# EAGLE board contador_programado (EAGLE 9.7.0)

Size 218.29 x 59.69 mm. Coordinates in mm from the lower left corner, seen from the top.
Outline: 0,0 218.29,0 218.29,59.69 0,59.69 0,0
Copper layers (1*16): Top 0.035mm / dielectric 1.5mm / Bottom 0.035mm
Design rules "default": minimum track width 6mil, minimum drill 0.35mm, track to track 6mil, track to pad 6mil, pad to pad 6mil, via to via 6mil, smd to smd 6mil, copper to edge 40mil, drill to drill 6mil, minimum pad ring 10mil, minimum via ring 8mil, stop-mask expansion 4mil, vias tented up to drill 0mil, thermal gap 10mil

## Footprints (pad centres in the part's own frame; a part is rotated, then mirrored left to right if it is on the bottom)
LEDRD254W60D565H860B_G = drill 0.981 pad 1.581: 1 -1.27,0; 2 1.27,0
7SEG-13 = drill 0.813 long: 1 -5.08,-7.62; 2 -2.54,-7.62; 3 0,-7.62; 4 2.54,-7.62; 5 5.08,-7.62; 6 5.08,7.62; 7 2.54,7.62; 8 0,7.62; 9 -2.54,7.62; 10 -5.08,7.62
RESAD1016W63L850D250B = drill 0.83 pad 1.43: 1 -5.08,0; 2 5.08,0
SWITCH-MOMENTARY-PTH-6.5MM = drill 1.016 pad 1.88: 1 -3.251,2.261; 2 3.251,2.261; 3 -3.251,-2.261; 4 3.251,-2.261
TO92 = drill 0.813 octagon: 1 -1.27,0; 2 0,1.905; 3 1.27,0
ARDUINO-UNO-R3-SHIELD = drill 1.016 pad 1.88: 3.3V 24.13,-2.54; 5V 24.13,0; A0 24.13,12.7; A1 24.13,15.24; A2 24.13,17.78; A3 24.13,20.32; A4 24.13,22.86; A5 24.13,25.4; AREF -24.13,-13.97; D2 -24.13,20.32; D3 -24.13,17.78; D4 -24.13,15.24; D5 -24.13,12.7; D6 -24.13,10.16; D7 -24.13,7.62; D8 -24.13,3.81; D9 -24.13,1.27; D10 -24.13,-1.27; D11 -24.13,-3.81; D12 -24.13,-6.35; D13 -24.13,-8.89; GND@0 24.13,2.54; GND@1 24.13,5.08; GND@2 -24.13,-11.43; IOREF 24.13,-7.62; NC 24.13,-10.16; RES 24.13,-5.08; RX -24.13,25.4; SCL -24.13,-19.05; SDA -24.13,-16.51; TX -24.13,22.86; VIN 24.13,7.62

## Placement (x,y rotation side)
D1  GREEN  [LEDRD254W60D565H860B_G]  195.35,18.8 180 top
DIGIT3  7SEG-CK  [7SEG-13]  130.58,31.5 0 top
DIGIT4  7SEG-CK  [7SEG-13]  143.28,31.5 0 top
R1  1k  [RESAD1016W63L850D250B]  209.32,34.04 0 top
R2  1k  [RESAD1016W63L850D250B]  209.32,18.8 0 top
R3  220  [RESAD1016W63L850D250B]  194.08,13.72 90 top
R17  220  [RESAD1016W63L850D250B]  158.52,28.96 90 top
R18  220  [RESAD1016W63L850D250B]  161.06,28.96 90 top
R19  220  [RESAD1016W63L850D250B]  163.6,28.96 90 top
R20  220  [RESAD1016W63L850D250B]  166.14,28.96 90 top
R21  220  [RESAD1016W63L850D250B]  168.68,28.96 90 top
R22  220  [RESAD1016W63L850D250B]  171.22,28.96 90 top
R23  220  [RESAD1016W63L850D250B]  173.76,28.96 90 top
R25  220  [RESAD1016W63L850D250B]  115.34,28.96 90 top
R26  220  [RESAD1016W63L850D250B]  112.8,28.96 90 top
R27  220  [RESAD1016W63L850D250B]  110.26,28.96 90 top
R28  220  [RESAD1016W63L850D250B]  107.72,28.96 90 top
R29  220  [RESAD1016W63L850D250B]  105.18,28.96 90 top
R30  220  [RESAD1016W63L850D250B]  102.64,28.96 90 top
R31  220  [RESAD1016W63L850D250B]  100.1,28.96 90 top
S1  SWITCH_MOMENTARY  [SWITCH-MOMENTARY-PTH-6.5MM]  89.94,22.61 90 top
S2  SWITCH_MOMENTARY  [SWITCH-MOMENTARY-PTH-6.5MM]  189,22.61 90 top
S3  SWITCH_MOMENTARY  [SWITCH-MOMENTARY-PTH-6.5MM]  181.38,22.61 90 top
T1  NPN  [TO92]  204.24,39.12 0 top
T2  NPN  [TO92]  204.24,21.34 0 top
U1  ARDUINO-UNO-R3-SHIELD  [ARDUINO-UNO-R3-SHIELD]  47.88,29.84 270 top

## Library data of the parts
D1 = Tinkercad; CATEGORY: Opto-Electronic; SUB-CATEGORY: LED; VALUE: LED_GREEN
DIGIT3 DIGIT4 = Tinkercad; CATEGORY: Opto-Electronic; SUB-CATEGORY: Display; TYPE: 7-Segment
R1-R3 R17-R23 R25-R31 S1-S3 U1 = Tinkercad
T1 T2 = Tinkercad; CATEGORY: Transistor; SUB-CATEGORY: BJT; TYPE: NPN

## Nets
D1_C: D1.2 R3.2
DIGIT3_A: DIGIT3.7 R31.1
DIGIT3_B: DIGIT3.6 R30.1
DIGIT3_C: DIGIT3.4 R29.1
DIGIT3_CK1: DIGIT3.3 T2.1
DIGIT3_D: DIGIT3.2 R28.1
DIGIT3_E: DIGIT3.1 R27.1
DIGIT3_F: DIGIT3.9 R26.1
DIGIT3_G: DIGIT3.10 R25.1
DIGIT4_A: DIGIT4.7 R17.1
DIGIT4_B: DIGIT4.6 R18.1
DIGIT4_C: DIGIT4.4 R19.1
DIGIT4_CK2: DIGIT4.8 T1.1
DIGIT4_D: DIGIT4.2 R20.1
DIGIT4_E: DIGIT4.1 R21.1
DIGIT4_F: DIGIT4.9 R22.1
DIGIT4_G: DIGIT4.10 R23.1
T1_B: R1.1 T1.2
T2_B: R2.1 T2.2
U1_D2: R17.2 R31.2 U1.D2
U1_D3: R18.2 R30.2 U1.D3
U1_D4: R19.2 R29.2 U1.D4
U1_D5: R20.2 R28.2 U1.D5
U1_D6: R21.2 R27.2 U1.D6
U1_D7: R22.2 R26.2 U1.D7
U1_D8: R23.2 R25.2 U1.D8
U1_D9: R2.2 U1.D9
U1_D10: R1.2 U1.D10
U1_D11: S1.1 S1.2 U1.D11
U1_D13: D1.1 U1.D13
U1_GND: R3.1 S1.3 S1.4 S2.1 S2.2 S3.1 S3.2 T1.3 T2.3 U1.GND@0 U1.GND@1 U1.GND@2
U1_RX: S2.3 S2.4 U1.RX
U1_TX: S3.3 S3.4 U1.TX

## Tracks (layer width: path | path; a pad name or v marks a point on that pad's centre or on a via)
D1_C  (1 unrouted)
DIGIT3_A  (1 unrouted)
DIGIT3_B  (1 unrouted)
DIGIT3_C  (1 unrouted)
DIGIT3_CK1  (1 unrouted)
DIGIT3_D  (1 unrouted)
DIGIT3_E  (1 unrouted)
DIGIT3_F  (1 unrouted)
DIGIT3_G  (1 unrouted)
DIGIT4_A  (1 unrouted)
DIGIT4_B  (1 unrouted)
DIGIT4_C  (1 unrouted)
DIGIT4_CK2  (1 unrouted)
DIGIT4_D  (1 unrouted)
DIGIT4_E  (1 unrouted)
DIGIT4_F  (1 unrouted)
DIGIT4_G  (1 unrouted)
T1_B  (1 unrouted)
T2_B  (1 unrouted)
U1_D2  (2 unrouted)
U1_D3  (2 unrouted)
U1_D4  (2 unrouted)
U1_D5  (2 unrouted)
U1_D6  (2 unrouted)
U1_D7  (2 unrouted)
U1_D8  (2 unrouted)
U1_D9  (1 unrouted)
U1_D10  (1 unrouted)
U1_D11  (2 unrouted)
U1_D13  (1 unrouted)
U1_GND  (11 unrouted)
U1_RX  (2 unrouted)
U1_TX  (2 unrouted)